# EAGLE board FeatherwingCircuitDual (EAGLE 9.2.2)
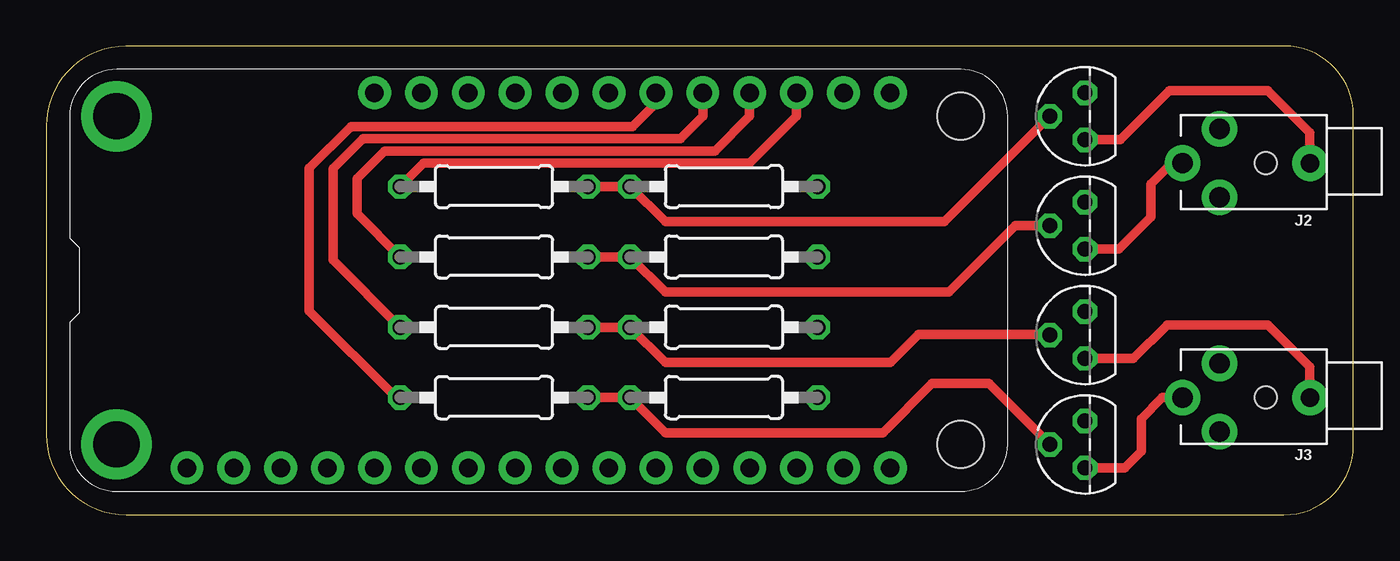
[diagram p0: board, top side]
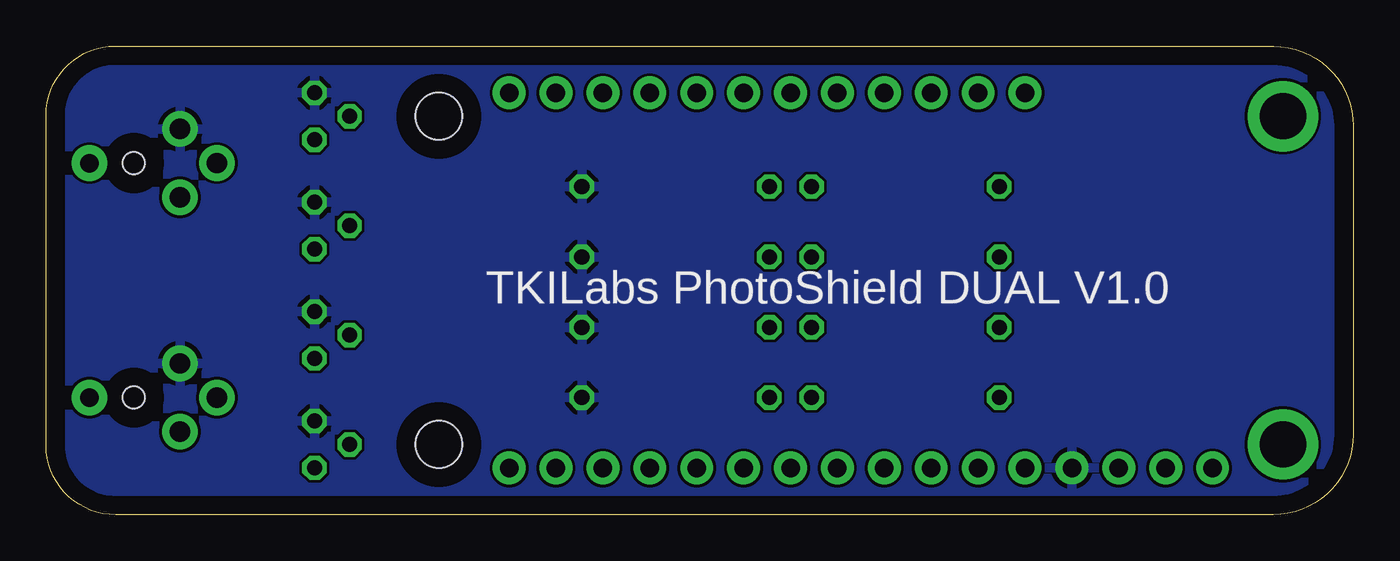
[diagram p1: board, bottom side, seen from below]

Size 70.79 x 25.39 mm. Coordinates in mm from the lower left corner, seen from the top.
Outline: 0,21.07 0,4.34 arc90 4.34,0 67.03,0 arc90 70.79,3.75 70.79,21.65 arc90 67.05,25.39 4.32,25.39 arc90 0,21.07
Copper layers (1*16): Top 0.035mm / dielectric 1.5mm / Bottom 0.035mm
Design rules "default": minimum track width 6mil, minimum drill 0.35mm, track to track 6mil, track to pad 6mil, pad to pad 6mil, via to via 6mil, smd to smd 6mil, copper to edge 40mil, drill to drill 6mil, minimum pad ring 10mil, minimum via ring 8mil, stop-mask expansion 4mil, vias tented up to drill 0mil, thermal gap 10mil

## Footprints (pad centres in the part's own frame; a part is rotated, then mirrored left to right if it is on the bottom)
STEREOJACK2.5MM_STEREOJACK2.5MM = drill 1.1 pad 1.93: RING1 2.5,-1.85; RING2 2.5,1.85; TIP 4.5,0 | drill 1 pad 1.93: SHIELD -2.4,0 | hole 1.2: 0,0
FEATHERWING_DIM = drill 1 pad 1.778: 1 6.35,1.27; 2 8.89,1.27; 3 11.43,1.27; 4 13.97,1.27; 5 16.51,1.27; 6 19.05,1.27; 7 21.59,1.27; 8 24.13,1.27; 9 26.67,1.27; 10 29.21,1.27; 11 31.75,1.27; 12 34.29,1.27; 13 36.83,1.27; 14 39.37,1.27; 15 41.91,1.27; 16 44.45,1.27; 17 44.45,21.59; 18 41.91,21.59; 19 39.37,21.59; 20 36.83,21.59; 21 34.29,21.59; 22 31.75,21.59; 23 29.21,21.59; 24 26.67,21.59; 25 24.13,21.59; 26 21.59,21.59; 27 19.05,21.59; 28 16.51,21.59 | drill 2.5 pad 3.81: P$1 2.54,20.32; P$2 2.54,2.54 | hole 2.54: 48.26,20.32; 48.26,2.54
TO92 = drill 0.813 octagon: 1 1.27,0; 2 0,1.905; 3 -1.27,0
PR-D2.3XL6.5MM = drill 0.813 octagon: 1 -4.953,0; 2 5.207,0

## Placement (x,y rotation side)
J2  [STEREOJACK2.5MM_STEREOJACK2.5MM]  66.04,19.05 180 top
J3  [STEREOJACK2.5MM_STEREOJACK2.5MM]  66.04,6.35 180 top
MS1  FEATHERWING_NODIM  [FEATHERWING_DIM]  1.27,1.27 0 top
Q1  BC547B  [TO92]  56.26,15.66 90 top
Q2  BC547B  [TO92]  56.26,21.59 90 top
Q3  BC547B  [TO92]  56.26,3.81 90 top
Q4  BC547B  [TO92]  56.26,9.74 90 top
R1  10K  [PR-D2.3XL6.5MM]  24.13,13.97 0 top
R2  10K  [PR-D2.3XL6.5MM]  24.13,17.78 0 top
R3  10K  [PR-D2.3XL6.5MM]  36.83,13.97 180 top
R4  10K  [PR-D2.3XL6.5MM]  36.83,17.78 180 top
R5  10K  [PR-D2.3XL6.5MM]  24.13,6.35 0 top
R6  10K  [PR-D2.3XL6.5MM]  24.13,10.16 0 top
R7  10K  [PR-D2.3XL6.5MM]  36.83,6.35 180 top
R8  10K  [PR-D2.3XL6.5MM]  36.83,10.16 180 top

## Library data of the parts
J2 J3 = SparkFun-Connectors; PROD_ID: CONN-09878
MS1 = adafruit
Q1-Q4 = transistor-npn
R1-R8 = Seeed-Resistor; MPN: FHCFR-1/4W-103J

## Nets
GND: J2.RING1 J3.RING1 MS1.4 Q1.1 Q2.1 Q3.1 Q4.1 R3.1 R4.1 R7.1 R8.1
N$1: Q1.2 R1.2 R3.2
N$2: Q2.2 R2.2 R4.2
N$3: J2.TIP Q1.3
N$4: J2.SHIELD Q2.3
N$5: Q3.2 R5.2 R7.2
N$6: MS1.19 R2.1
N$7: MS1.20 R1.1
N$8: Q4.2 R6.2 R8.2
N$9: J3.TIP Q3.3
N$10: J3.SHIELD Q4.3
N$11: MS1.21 R6.1
N$12: MS1.22 R5.1

## Tracks (layer width: path | path; a pad name or v marks a point on that pad's centre or on a via)
GND
  pour Bottom: -1.27,26.67 78.74,26.67 78.74,-1.27 -1.27,-1.27
N$1
  Top 0.508: R1.2 R3.2 33.53,12.06 48.9,12.06 52.49,15.66 Q1.2
N$2
  Top 0.508: R2.2 R4.2 33.53,15.88 48.64,15.88 Q2.2 | Q2.2
N$3
  Top 0.508: Q1.3 58.08,14.39 59.82,16.13 59.82,17.91 60.96,19.05 J2.TIP
N$4
  Top 0.508: Q2.3 58.17,20.32 60.83,22.99 66.17,22.99 68.44,20.71 J2.SHIELD
N$5
  Top 0.508: R5.2 R7.2 33.53,4.45 45.3,4.45 47.97,7.11 51.05,7.11 Q3.2
N$6
  Top 0.508: R2.1 20.45,19.05 38.1,19.05 40.64,21.59 MS1.19
N$7
  Top 0.508: R1.1 16.84,16.31 16.84,18.22 18.33,19.71 36.22,19.71 38.1,21.59 MS1.20
N$8
  Top 0.508: R6.2 R8.2 33.53,8.26 45.72,8.26 47.24,9.78 54.31,9.78 Q4.2
N$9
  Top 0.508: Q3.3 58.42,2.54 59.31,3.43 59.31,5.21 60.45,6.35 J3.TIP
N$10
  Top 0.508: Q4.3 58.89,8.47 60.71,10.29 66.17,10.29 68.44,8.01 J3.SHIELD
N$11
  Top 0.508: R6.1 15.54,13.79 15.54,18.75 17.17,20.37 34.34,20.37 35.56,21.59 MS1.21
N$12
  Top 0.508: R5.1 18.94,6.35 14.25,11.04 14.25,18.77 16.51,21.03 31.75,21.03 33.02,22.3 MS1.22

## Text on the board
bNames: TKILabs PhotoShield DUAL V1.0